# EAGLE board plate (EAGLE 7.7.0)
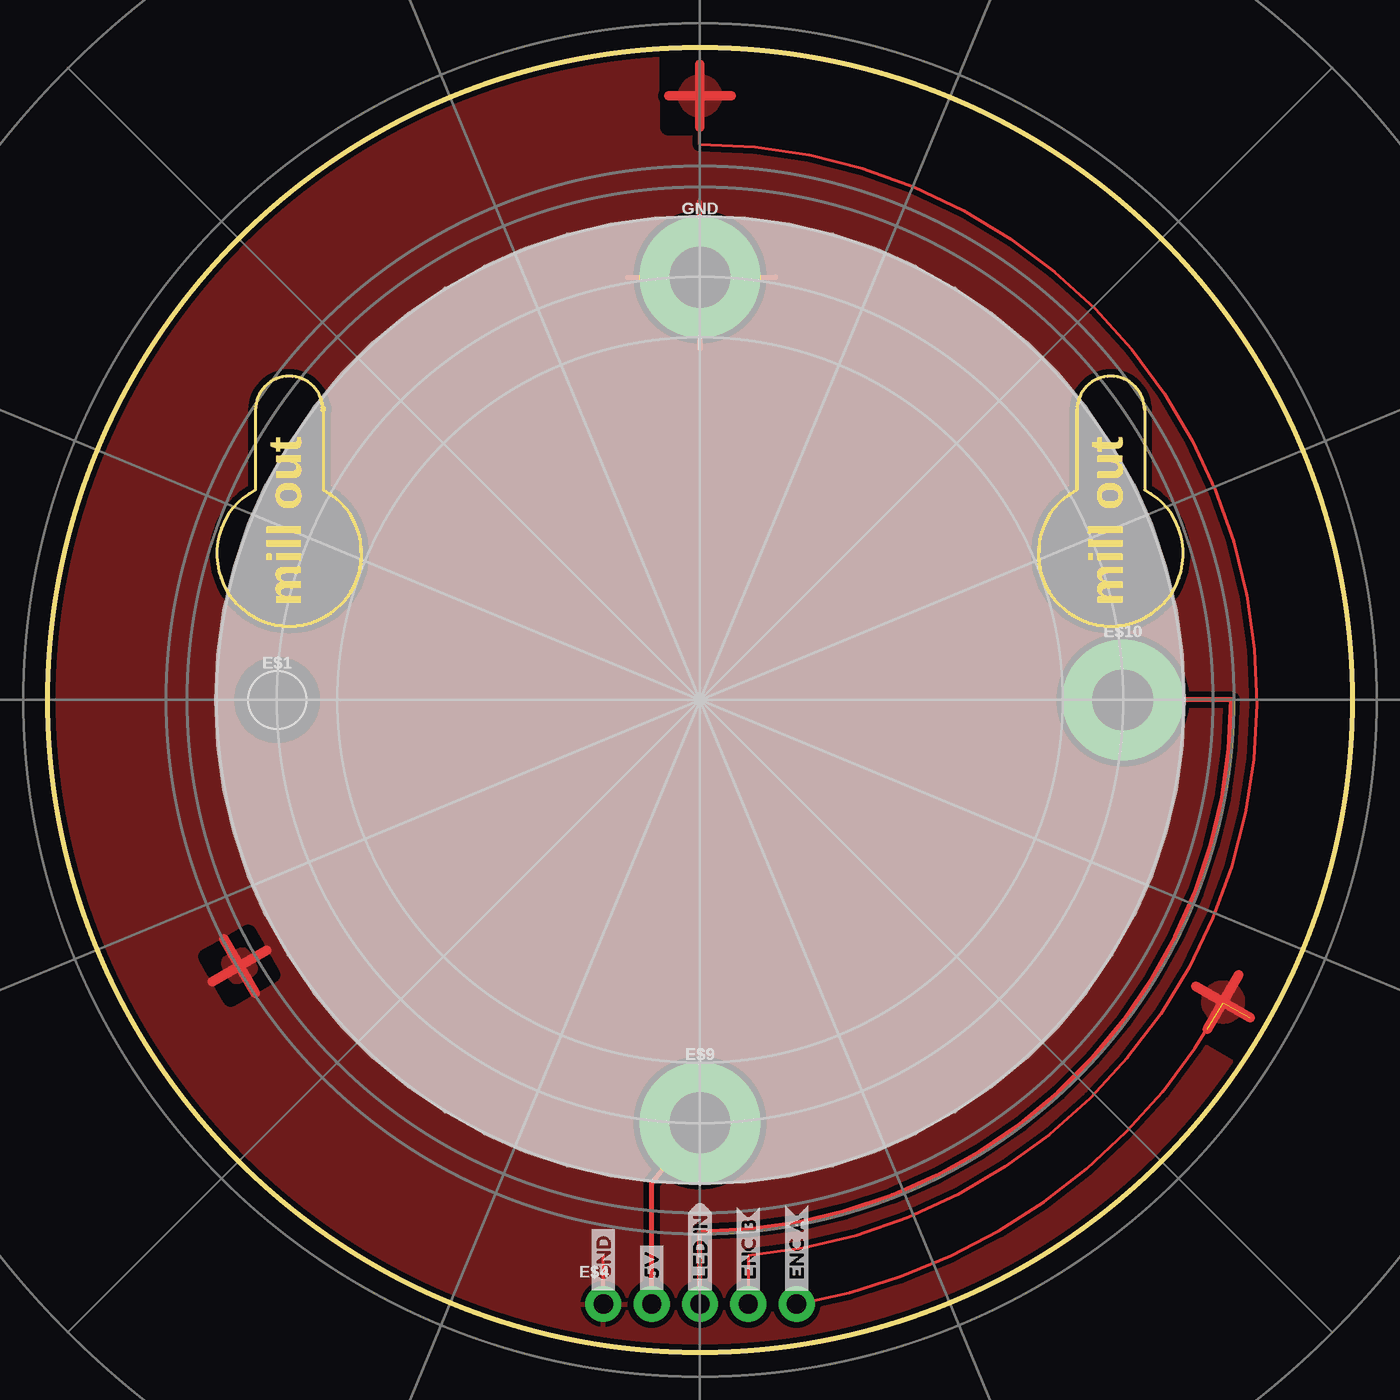
[diagram p0: board, top side]
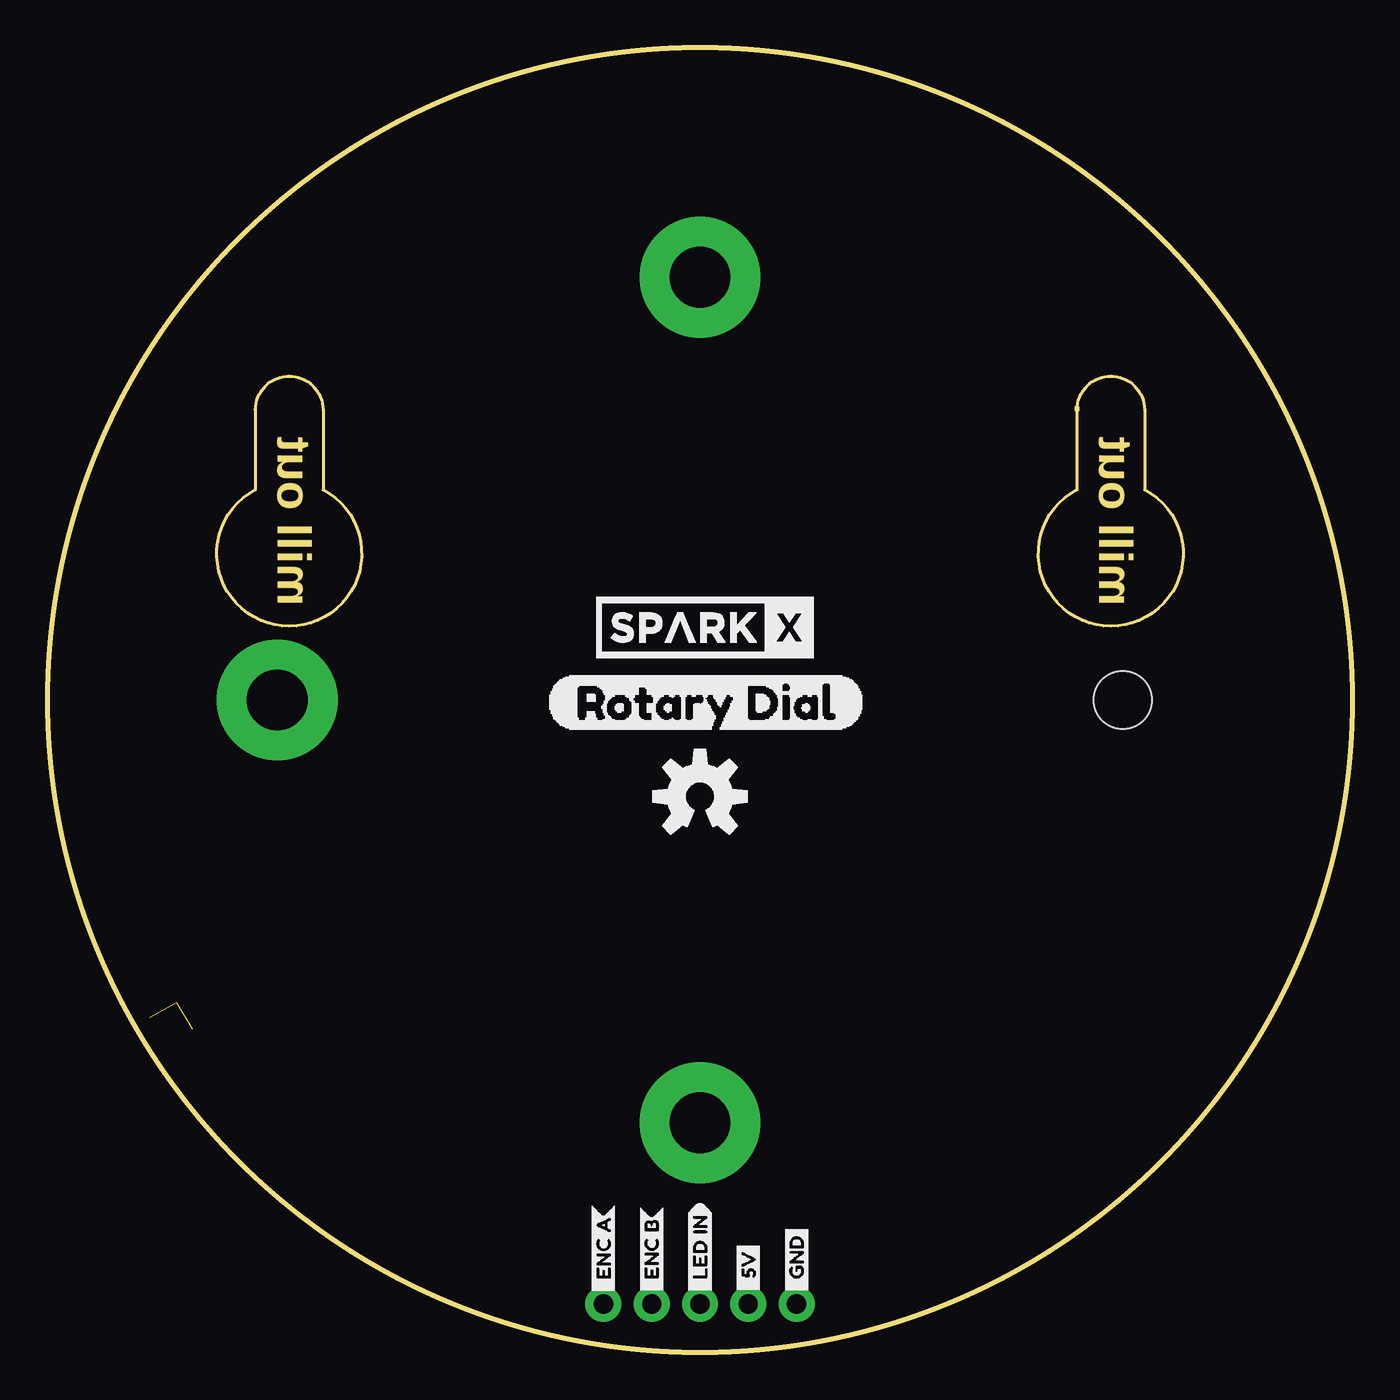
[diagram p1: board, bottom side, seen from below]

Size 68.58 x 68.58 mm. Coordinates in mm from the lower left corner, seen from the top.
Outline: 14.48,49.66 14.48,49.53
Outline: 14.48,49.53 14.48,45.34 arc-304 10.92,45.34 10.92,49.53 arc-180 14.48,49.53
Outline: 57.66,49.66 57.66,49.53
Outline: 57.66,49.53 57.66,45.34 arc-304 54.1,45.34 54.1,49.53 arc-180 57.66,49.53
Outline: circle at 34.29,34.29 radius 34.29
Copper layers (1*16): Top 0.035mm / dielectric 1.5mm / Bottom 0.035mm
Design rules "SparkFun-2-layer-PCBWay-LIMIT": minimum track width 6mil, minimum drill 0.3mm, track to track 6mil, track to pad 6mil, pad to pad 6mil, via to via 6mil, smd to smd 6mil, copper to edge 6mil, drill to drill 6mil, minimum pad ring 7mil, minimum via ring 7mil, stop-mask expansion 4mil, vias tented up to drill 25mil, thermal gap 10mil
tRestrict: area 9.2,18.6 to 10.4,19.4; area 11,19.4 to 11.8,20.6; area 8.3,20 to 9.1,21.2; area 9.8,21.3 to 11,22.1; area 32.6,66.5 to 33.8,68; area 32.6,64.4 to 33.8,65.5; area 61.2,15.7 to 63.4,17

## Footprints (pad centres in the part's own frame; a part is rotated, then mirrored left to right if it is on the bottom)
STAND-OFF-TIGHT = hole 3.048: 0,0
1X05_NO_SILK = drill 1.016 pad 1.88: 1 0,0; 2 2.54,0; 3 5.08,0; 4 7.62,0; 5 10.16,0
STANDOFF-ELECTRICAL = drill 3.2 pad 6.35: P1 0,0

## Placement (x,y rotation side)
E$1  [STAND-OFF-TIGHT]  12.06,34.29 0 top
E$2  [_ENC_A0]  39.37,2.84 90 top
E$3  [_ENC_B1]  36.83,2.9 90 top
E$4  [1X05_NO_SILK]  29.21,2.54 0 top
E$5  [_LED_IN2]  34.29,2.9 90 top
E$6  [_GND0]  29.21,2.9 90 top
E$7  [_5V0]  31.75,2.95 90 top
E$8  [ROTARY_DIAL0]  42.42,34.16 0 bottom
E$9  [STANDOFF-ELECTRICAL]  34.29,12.06 0 top
E$10  [STANDOFF-ELECTRICAL]  56.52,34.29 0 top
E$11  [SPARKX-LARGE]  34.04,38.1 0 bottom
E$12  [OSHW-LOGO-M]  34.29,29.21 0 bottom
E$13  [_GND0]  29.21,2.9 90 bottom
E$14  [_5V0]  31.75,2.95 90 bottom
E$15  [_LED_IN2]  34.29,2.9 90 bottom
E$16  [_ENC_B1]  36.83,2.9 90 bottom
E$17  [_ENC_A0]  39.37,2.84 90 bottom
GND  [STANDOFF-ELECTRICAL]  34.29,56.52 0 top

## Library data of the parts
E$1 E$9 E$10 GND = SparkFun-Hardware
E$2 E$3 E$5 E$15-E$17 = buzzard_labels (41)
E$4 = SparkFun-Connectors
E$6 E$13 = buzzard_labels (44)
E$7 E$14 = buzzard_labels (42)
E$8 = buzzard_labels (47)
E$11 = SparkX
E$12 = SparkFun-Aesthetics

## Nets
GND: E$4.1
S$1: E$4.3
S$2: E$4.2 E$9.P1
W1: E$4.4
W2: E$4.5

## Tracks (layer width: path | path; a pad name or v marks a point on that pad's centre or on a via)
GND
  Top 0.152: E$4.1 29.21,5.08
  Top 0.254: 34.29,56.49 34.27,56.49 | 34.27,56.49 30.48,56.49 | 34.27,56.49 34.27,60.48 | 34.27,56.52 34.29,56.52 | 34.29,56.52 38.25,56.52 38.25,56.49 | 34.29,56.52 34.29,52.73
  Top 0.508: 10.92,18.89 9.27,21.75 | 8.66,19.49 11.52,21.15
  pour Top (isolate 0.305): 9.21,19.81 arc-90 9.59,21.2 arc-90 10.97,20.83 arc-90 10.6,19.44 arc-90
  pour Top (isolate 0.305): 34.29,68.58 arc-90 68.58,34.29 arc-90 34.29,0 arc-90 0,34.29 arc-90
S$1
  Top 0.254: E$4.3 34.29,6.35 arc90 62.23,34.29 56.49,34.29
S$2
  Top 0.254: E$4.2 31.75,8.89 E$9.P1
W1
  Top 0.152: E$4.4 36.83,5.08 arc175 34.29,63.5 34.29,66.04
  Top 0.508: 34.29,67.69 34.29,66.04 | 34.29,66.04 34.29,64.39 | 32.64,66.04 34.29,66.04 | 34.29,66.04 35.94,66.04
  pour Top (isolate 0.305): 34.29,67.06 arc-90 35.31,66.04 arc-90 34.29,65.02 arc-90 33.27,66.04 arc-90
W2  (2 unrouted)
  Top 0.152: E$4.5 arc51 61.8,18.39
  Top 0.508: 63.22,17.59 60.36,19.24 | 62.61,19.84 60.96,16.98
  pour Top (isolate 0.305): 62.67,17.91 arc-90 61.28,17.54 arc-90 60.91,18.92 arc-90 62.29,19.29 arc-90

## Text on the board
Dimension: mill out | mill out